# Altium PCB ALTAIR_PD_Soldier_V26.1c.PcbDoc (part 4 of 4)
Units mm, origin at the board's own origin, x right, y up, seen from the top; angles counter-clockwise.
Board outline 74 x 56 mm, 4 copper layers (Top Layer, Layer 1, Layer 2, Bottom Layer), stack 1.675 mm thick; 206 components, 124 nets, 616 pads, 540 vias.
Unrouted connection lines stored in the file: 139.
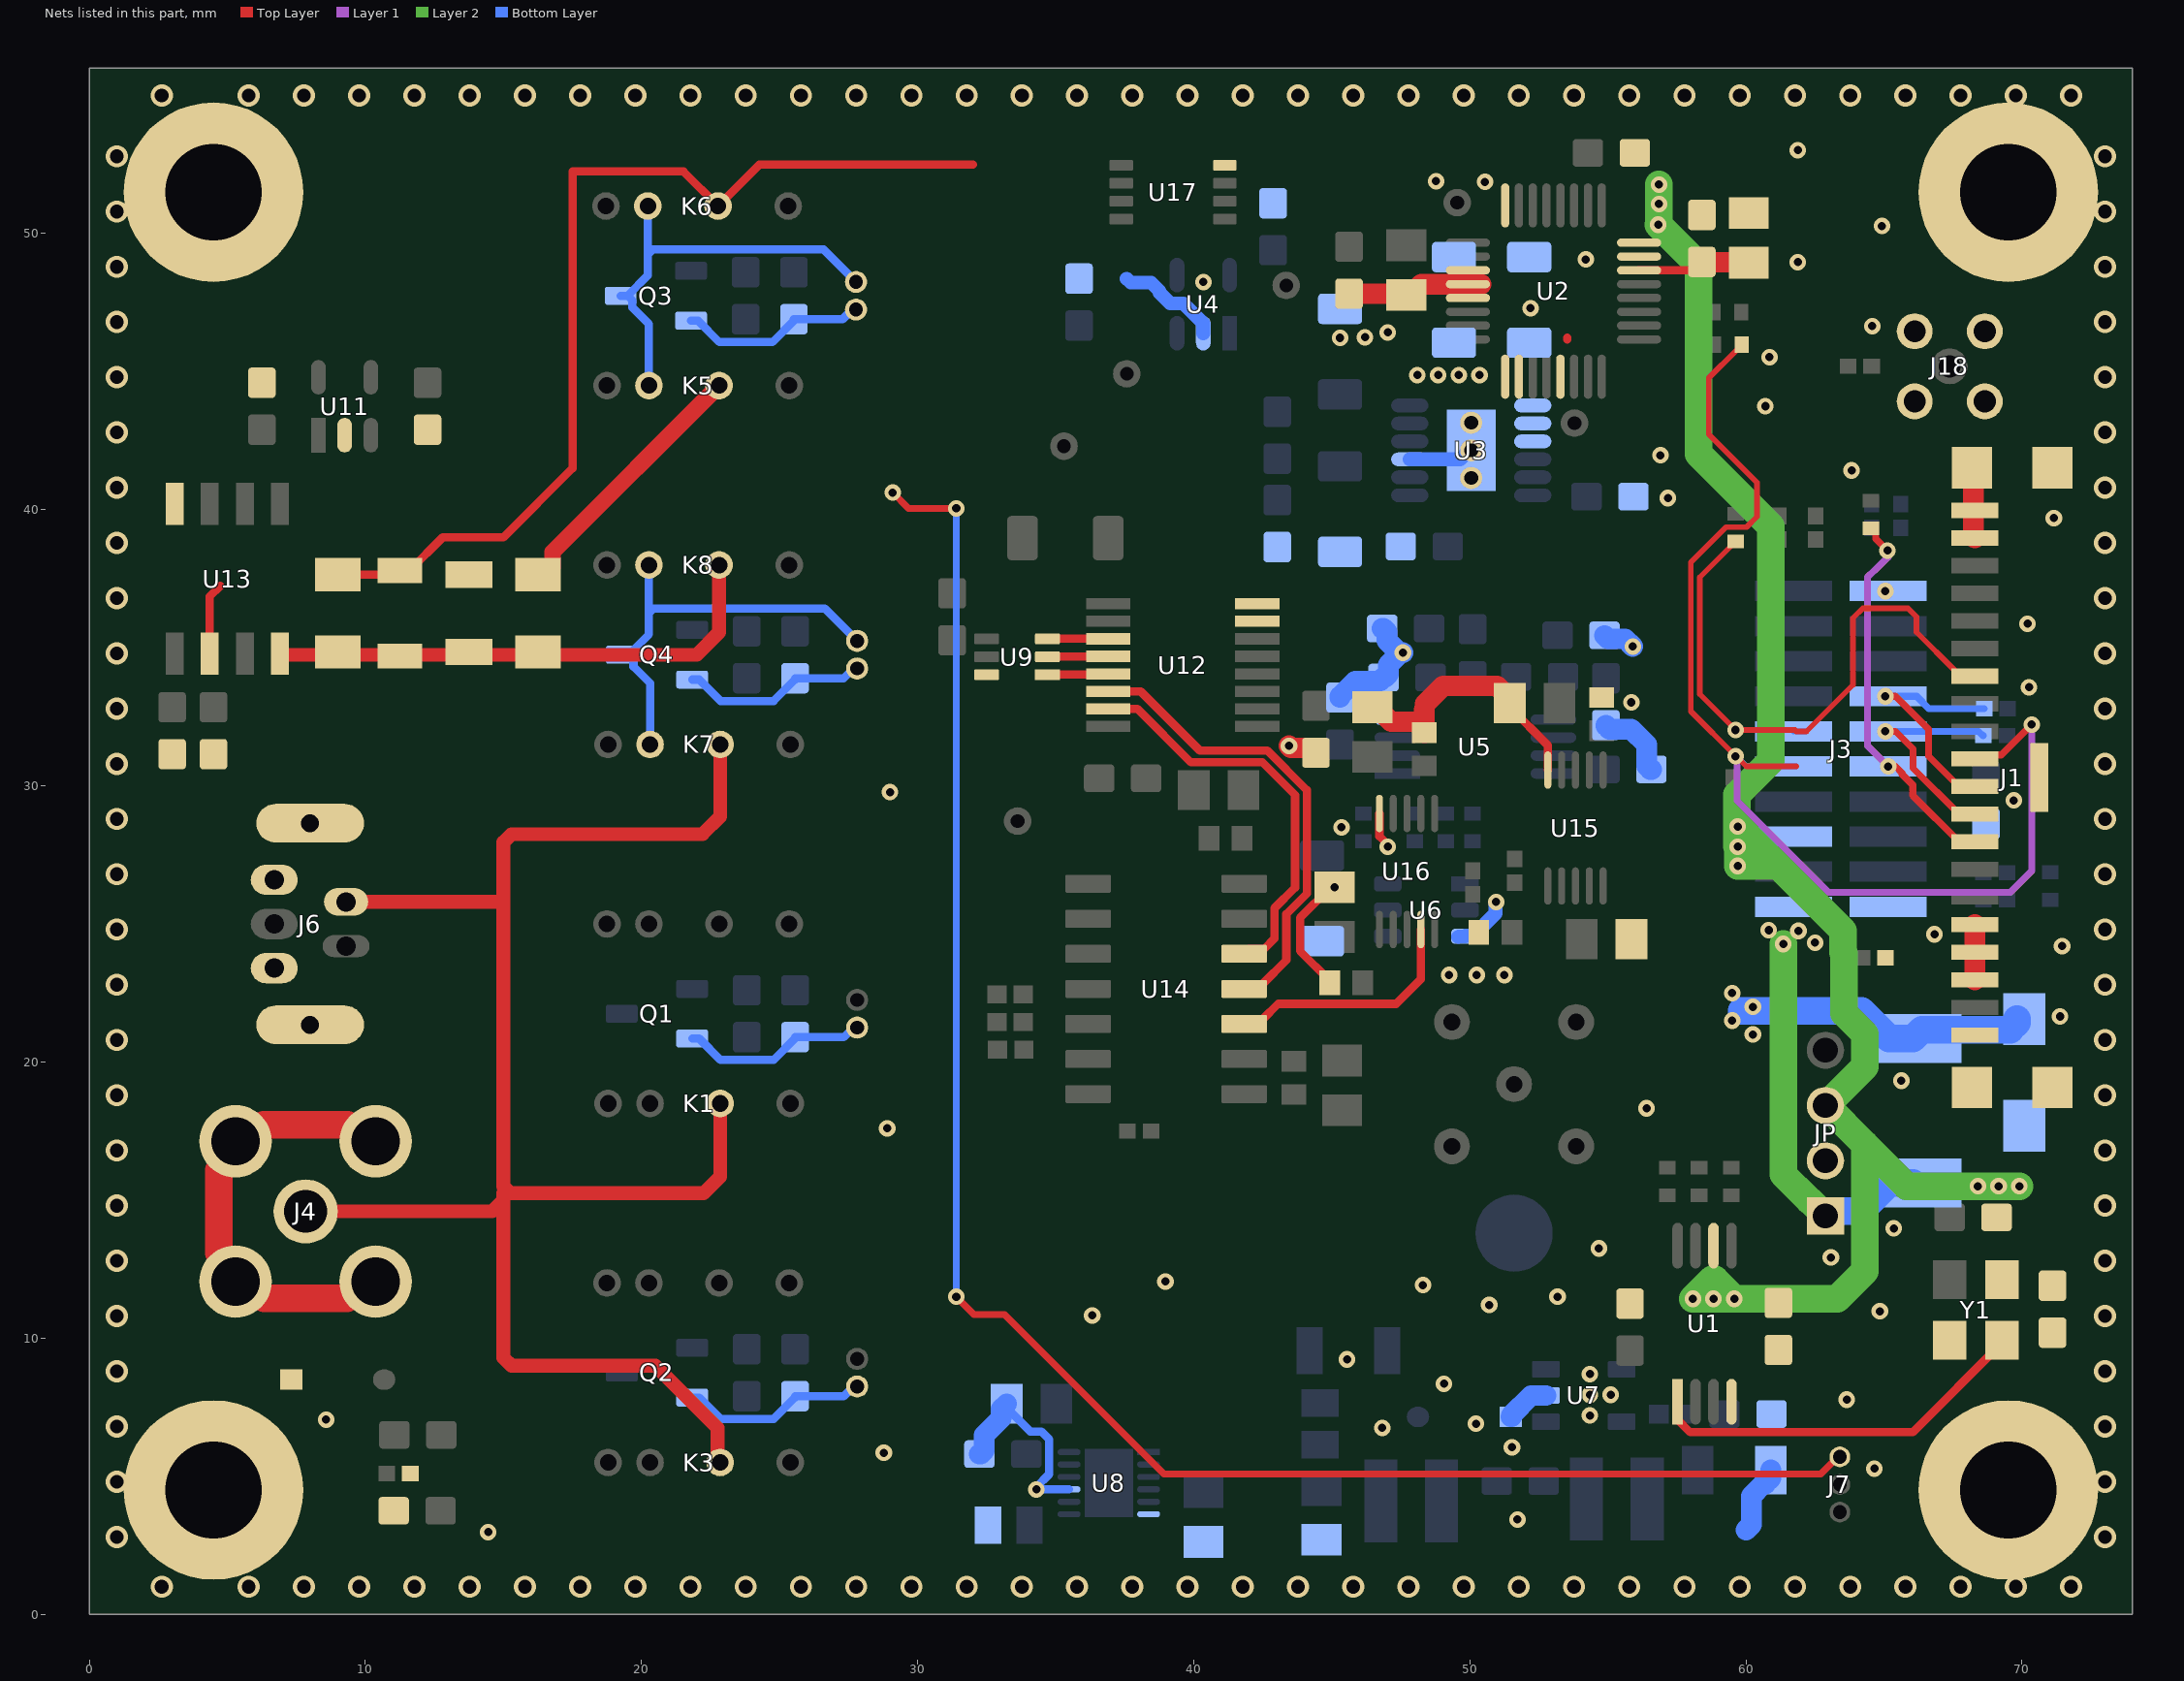
[diagram p5: the nets of this part, all layers, seen from the top]

## Via types
v1: diameter 0.6, hole 0.3, Top Layer to Bottom Layer, tented both sides, 212 vias
v2: diameter 0.6, hole 0.3, Top Layer to Bottom Layer, 206 vias
v3: diameter 0.8, hole 0.5, Top Layer to Bottom Layer, 122 vias

## Nets (pads, with @x,y where several pads share a name; then routed paths per layer and width w, separated by ;. In a path a pad name is that pad's centre, name@x,y a point inside that pad or via, vN(x,y) a via of type N, cw(c..) or ccw(c..) an arc to the next point about the centre after c; other vN are vias at no path point) (continued)
NetU1_1: U1.1 Y1.3 | length 14
  Top Layer w0.3: U1.1@57.525,7.7 57.565,7.659 57.565,7.011 57.981,6.595 66.045,6.595 69.275,9.825 Y1.3@69.275,9.925
NetU9_1: U9.1 U12.13 | length 2.2
  Top Layer w0.3: U9.1@34.7,34.025 34.716,34.041 36.884,34.041 U12.13@36.9,34.058
NetU9_2: U9.2 U12.12 | length 2.2
  Top Layer w0.3: U9.2@34.7,34.675 34.709,34.684 36.891,34.684 U12.12@36.9,34.693
NetU9_3: U9.3 U12.11 | length 2.2
  Top Layer w0.3: U9.3@34.7,35.325 34.701,35.326 36.899,35.326 U12.11@36.9,35.328
NetU12_14: U12.14 U14.11 | length 17.1
  Top Layer w0.3: U12.14@36.9,33.423 38.078,33.423 40.221,31.279 42.667,31.279 44.097,29.849 44.097,26.097 43.354,25.354 43.354,23.688 42.5,22.834 42.5,22.825 42.325,22.65 U14.11@41.825,22.65
NetU12_15: U12.15 U14.12 | length 14.9
  Top Layer w0.3: U12.15@36.9,32.788 37.963,32.788 39.898,30.852 42.49,30.852 43.67,29.672 43.67,26.32 42.927,25.577 42.927,24.477 42.545,24.095 42,24.095 U14.12@41.825,23.92
NetU14_10: U14.10 U16.9 | length 8.9
  Top Layer w0.3: U14.10@41.825,21.38 42,21.555 42.505,21.555 43.058,22.108 47.333,22.108 48.225,23 U16.9@48.225,24.8
PD_A: J4.1 J6.2 K1.3 K3.3 K7.3 | length 63.3
  Top Layer w0.5: J4.1@7.835,14.59 14.59,14.59 15,15 ; J6.2@9.3,25.8 14.95,25.8 15,25.75 ; 15,15.25 15,15 ; K3.3@22.85,5.5 22.754,5.596 22.754,6.746 20.5,9 15.293,9 15,9.293 15,15 ; K1.3@22.85,18.5 22.85,15.85 22.25,15.25 15.25,15.25 15,15.5 15,25.75 ; K7.3@22.85,31.5 22.85,28.893 22.207,28.25 15.293,28.25 15,27.957 15,25.75
PD_K: C0.2 D3.1 J4.2 J4.3 J4.4 J4.5 J6.1 R0.2 | length 16.7
  Top Layer w1: 7.825,11.44 7.835,11.45 ; J4.3@10.375,12.05 9.935,12.05 9.335,11.45 7.835,11.45 ; J4.2@10.375,17.13 9.935,17.13 9.34,17.725 7.7,17.725 6.33,17.725 5.735,17.13 J4.4@5.295,17.13 5.295,16.69 4.685,16.08 4.685,13.1 5.295,12.49 J4.5@5.295,12.05 5.735,12.05 6.335,11.45 7.835,11.45
SPI_MISO: J1.10 J3.11 R58.2 | length 44.7
  Top Layer w0.2: R58.2@59.85,45.975 59.85,45.925 59.7,45.775 59.65,45.775 58.654,44.779 58.654,42.731 60.4,40.985 60.4,39.754 60.019,39.373 59.277,39.373 58,38.096 58,32.7 v1(59.625,31.075) 59.646,31.075 60.016,30.705 61.824,30.705
  Top Layer w0.254: J1.10@68.291,30.975 68.439,31.123 69.248,31.123 v1(70.35,32.225)
  Layer 1 w0.254: v1(59.625,31.075) 59.678,31.022 59.678,29.462 62.993,26.147 69.572,26.147 70.35,26.925 v1(70.35,32.225)
  Bottom Layer w0.2: v1(59.625,31.075) 59.656,31.075 60.026,30.705 J3.11@61.723,30.705
SPI_MOSI: J1.13 J3.12 R5.1 | length 13.5
  Top Layer w0.254: R5.1@64.525,39.325 64.575,39.325 64.698,39.202 64.698,38.952 v1(65.125,38.525) ; v1@65.418,30.705 65.66,30.464 65.66,30.415 66.041,30.034 66.041,29.651 67.716,27.975 J1.13@68.291,27.975
  Layer 1 w0.254: v1@65.15,38.275 65.131,38.275 64.659,37.803 64.646,37.803 64.403,37.559 64.403,31.454 v1(65.152,30.705)
SPI_SCLK: J1.7 J3.09 R11.1 | length 23.3
  Top Layer w0.2: R11.1@59.625,38.85 58.327,37.552 58.327,33.323 v1(59.625,32.025) 61.774,32.025 61.824,31.975 62.192,31.975 63.875,33.658 63.875,36.074 64.233,36.432 65.867,36.432 66.175,36.124 66.175,35.567 J1.7@67.568,34.174 ; J1.7@67.568,34.123 J1.7@67.716,33.975
  Top Layer w0.254: J1.7@67.716,33.975 J1.7@68.291,33.975
  Bottom Layer w0.2: v1(59.625,32.025) 61.673,32.025 J3.09@61.723,31.975
STRT1: J1.12 J3.10 R6.1 | length 8.4
  Top Layer w0.254: v1(65.05,31.975) 65.418,31.975 66.05,31.343 66.05,30.641 67.716,28.975 J1.12@68.291,28.975
  Bottom Layer w0.254: J3.10@65.152,31.975 68.425,31.975 68.575,31.825 R6.1@68.6,31.825
STRT2: J1.11 J3.08 R7.1 | length 8.9
  Top Layer w0.254: v1(65.05,33.245) 65.418,33.245 66.614,32.049 66.614,31.077 67.716,29.975 J1.11@68.291,29.975
  Bottom Layer w0.254: v1(65.05,33.245) 66.18,33.245 66.625,32.8 R7.1@68.625,32.8
SYS_DVDD: C47.2 C48.2 C50.2 C51.2 J3.15 JP.3 R1.1 R60.2 R61.2 U1.6 U2.15 U2.16 Y1.4 | length 62.6
  Top Layer w0.5: R1.1@56.025,52.925 R1.1@56.275,52.675
  Layer 2 w1: v1(56.825,50.325) 58.28,48.87 58.28,42.02 60.895,39.405 60.895,30.903 59.678,29.685 v1@59.678,28.59 ; v1@56.85,50.35 v1(56.85,51.075) v1(56.85,51.775) ; v1@59.678,27.822 59.678,28.503 59.721,28.546 63.52,24.748 63.52,23.98 63.55,23.95 63.55,21.771 64.304,21.017 64.304,19.833 JP.3@62.896,18.425 ; v1(59.7,27.8) v1(59.7,27.1) 60.992,27.1 ; JP.3@62.875,18.425 JP.3@62.896,18.425 ; v1(69.9,15.5) v1(69.15,15.5) v1(68.4,15.5) 65.821,15.5 64.304,17.017 ; v1(59.575,11.425) 58.875,12.125 58.775,12.125 v1(58.075,11.425) v1(58.825,11.425) v1(59.575,11.425) ; v1(59.575,11.425) 63.3,11.425 64.304,12.429 64.304,17.017 ; JP.3@62.896,18.425 64.304,17.017
  other v1: 59.7,28.525
SYS_GND: C1.1 C2.1 C3.1 C4.1 C5.2 C6.1 C7.1 C8.1 C9.1 C10.1 C11.1 C12.1 C13.1 C14.1 C17.2 C18.2 C19.2 C20.2 C21.2 C24.2 C25.1 C26.1 C28.1 C29.1 C32.1 C37.1 C38.1 C39.1 C40.1 C41.1 C42.1 C43.1 C44.1 C45.1 C46.1 C47.1 C48.1 C49.1 C50.1 C51.1 C52.1 C53.2 C54.1 C55.1 C56.1 C57.1 C58.1 D1.1 D2.1 D4.2 H1.1 H2.1 H3.1 H4.1 J1.1 J1.2 J1.16 J1.17 J1.18 J1.20 J1.MP1 J1.MP2 J1.MP3 J1.MP4 J1.MP5 J3.02 J3.20 J6.5 J6.6 J7.3 J14.1 J15.1 J16.1 J17.2 J18.2 J18.3 J18.4 J18.5 J19.1 JP.2 Q1.2 Q2.2 Q3.2 Q4.2 R8.2 R14.1 R15.1 R17.1 R20.2 R22.1 R24.1 R31.1 R32.2 R37.2 R40.2 R41.2 R43.2 R70.2 R99.1 RT1.1 U1.4 U2.1 U2.14 U2.24 U2.27 U2.28 U2.29 U3.9 U3.13 U4.2 U5.4 U6.3 U7.2 U8.6 U8.9 U10.4 U11.2 U12.7 U12.8 U13.4 U15.5 U16.5 U17.4 Y1.2 | length 157.3
  Top Layer w0.254: v1(29.1,40.625) 29.675,40.05 v1(31.4,40.05) ; v1(31.4,11.5) 32.044,10.856 33.148,10.856 38.923,5.081 62.712,5.081 63.331,5.7 J7.3@63.4,5.7
  Top Layer w0.3: C41.1@44.925,22.875 44.925,22.95 43.85,24.025 43.85,25.225 44.95,26.325 v1(45.1,26.325) ; U16.5@46.725,29 46.725,28.181 47.025,27.881 v1(47.025,27.8) ; C40.1@51.45,32.85 52.825,31.475 U15.5@52.825,30.575 ; U2.14@56.129,48.671 58.096,48.671 C47.1@58.4,48.975
  Top Layer w0.5: C37.1@50.325,24.625 C37.1@50.325,24.7
  Top Layer w0.75: J17.2@6.65,66.6 J17.2@6.65,69.4 v1@8.025,69.4 ; v1@8.125,69.4 J17.2@9.5,69.4 ; v1(43.45,31.45) 43.525,31.375 44.3,31.375 44.425,31.25 C26.1@44.425,31.2 ; C45.1@45.625,47.825 C46.1@47.7,47.825 ; C44.1@46.475,32.85 46.625,32.85 47.15,32.325 48.35,32.325 ; C46.1@47.7,47.775 47.85,47.775 48.246,48.171 U2.28@49.929,48.171 U2.28@50.4,48.171 ; C43.1@48.35,31.925 48.35,32.325 ; 48.35,32.764 48.35,32.325 ; 48.38,32.971 49.029,33.62 50.98,33.62 51.45,33.15 C40.1@51.45,33 ; C47.1@58.4,48.975 58.413,48.963 60.087,48.963 C48.1@60.1,48.95 ; J1.MP1@68.186,41.525 68.238,41.473 68.238,39.028 J1.2@68.291,38.975 ; J1.18@68.291,22.975 J1.17@68.291,23.975 J1.16@68.291,24.975
  Bottom Layer w0.254: v1(31.4,11.5) v1(31.4,40.05)
  Bottom Layer w0.3: Q3.2@21.795,46.85 22.045,46.85 22.822,46.073 24.743,46.073 25.52,46.85 R43.2@25.52,46.9 27.285,46.9 27.635,47.25 J16.1@27.77,47.25 ; Q2.2@21.835,7.85 22.085,7.85 22.862,7.073 24.783,7.073 25.56,7.85 R40.2@25.56,7.9 27.325,7.9 27.675,8.25 J15.1@27.81,8.25 ; Q1.2@21.835,20.85 22.085,20.85 22.862,20.073 24.783,20.073 25.56,20.85 R37.2@25.56,20.9 27.325,20.9 27.675,21.25 J14.1@27.81,21.25 ; Q4.2@21.835,33.85 22.085,33.85 22.862,33.073 24.783,33.073 25.56,33.85 R20.2@25.56,33.9 27.325,33.9 27.675,34.25 J19.1@27.81,34.25 ; C20.2@33.225,7.475 34.077,6.623 34.482,6.623 34.763,6.342 34.763,5.07 34.3,4.606 v1(34.3,4.525) U8.9@35.484,4.525
  Bottom Layer w0.5: 37.571,48.371 37.719,48.223 38.46,48.223 38.753,47.93 38.753,47.869 39.151,47.47 39.624,47.47 40.346,46.748 U4.2@40.346,46.396 ; U3.9@47.825,41.825 49.644,41.825 49.969,42.15 U3.13@50.05,42.15 ; U6.3@49.575,24.525 49.6,24.55 U6.3@49.825,24.55 49.85,24.575 50.128,24.575 50.931,25.378 50.931,25.781 v1(50.95,25.8)
  Bottom Layer w0.75: R32.2@32.236,5.8 32.286,5.8 32.411,5.925 32.411,6.486 33.025,7.1 33.025,7.425 C20.2@33.225,7.625 ; C13.1@45.3,33.2 45.3,33.25 45.85,33.8 46.75,33.8 C11.1@46.875,33.925 46.925,33.925 47.05,34.05 47.05,34.386 v1@47.489,34.825 ; R24.1@46.825,35.7 46.875,35.7 47,35.575 47,35.264 47.439,34.825 v1@47.489,34.825 ; v1(47.575,34.825) v1@47.489,34.825 ; D1.1@51.48,7.15 51.505,7.15 51.509,7.154 51.509,7.214 52.22,7.925 U7.2@52.75,7.925 ; R22.1@54.875,35.45 55,35.325 55.625,35.325 v1(55.9,35.05) ; C10.1@54.925,32.2 54.925,32.179 55.05,32.054 55.846,32.054 56.404,31.496 56.404,30.725 56.529,30.6 C9.1@56.575,30.6 ; 60,3.05 60.2,3.25 60.2,4.286 60.639,4.725 60.7,4.725 60.9,4.925 R31.1@60.9,5.225
  other v1: 14.45,2.975 51.726,3.432 64.65,5.275 28.775,5.85 51.525,6.05 46.825,6.75 50.225,6.9 8.575,7.05 63.65,7.775 49.062,8.348 45.552,9.232 36.325,10.825 64.85,10.975 50.7,11.2 53.175,11.5 48.3,11.925 38.975,12.05 63.075,12.925 54.675,13.25 65.35,13.975 28.9,17.6 56.4,18.325 65.625,19.325 71.375,21.65 49.25,23.15 50.25,23.15 51.25,23.15 71.45,24.2 66.825,24.625 69.7,29.475 29,29.775 55.85,33.025 70.25,33.575 70.2,35.875 65.05,37.055 71.15,39.7 57.175,40.425 63.825,41.425 56.9,41.975 60.7,43.75 60.85,45.525 45.3,46.225 46.2,46.25 47.025,46.425 64.575,46.65 52.2,47.3 40.346,48.246 61.878,48.968 54.196,49.063 64.925,50.275 50.55,51.875 48.775,51.9 61.875,53.025 8.075,69.45 -4.175,71.075
  other v3: 2.625,1 5.775,1 7.775,1 9.775,1 11.775,1 13.775,1 15.775,1 17.775,1 19.775,1 21.775,1 23.775,1 25.775,1 27.775,1 29.775,1 31.775,1 33.775,1 35.775,1 37.775,1 39.775,1 41.775,1 43.775,1 45.775,1 47.775,1 49.775,1 51.775,1 53.775,1 55.775,1 57.775,1 59.775,1 61.775,1 63.775,1 65.775,1 67.775,1 69.775,1 71.775,1 1,2.8 73,2.8 1,4.8 73,4.8 1,6.8 73,6.8 1,8.8 73,8.8 1,10.8 73,10.8 1,12.8 73,12.8 1,14.8 73,14.8 1,16.8 73,16.8 1,18.8 73,18.8 1,20.8 73,20.8 1,22.8 73,22.8 1,24.8 73,24.8 1,26.8 73,26.8 1,28.8 73,28.8 1,30.8 73,30.8 1,32.8 73,32.8 1,34.8 73,34.8 1,36.8 73,36.8 1,38.8 73,38.8 1,40.8 73,40.8 1,42.8 73,42.8 1,44.8 73,44.8 1,46.8 73,46.8 1,48.8 73,48.8 1,50.8 73,50.8 1,52.8 73,52.8 2.625,55 5.775,55 7.775,55 9.775,55 11.775,55 13.775,55 15.775,55 17.775,55 19.775,55 21.775,55 23.775,55 25.775,55 27.775,55 29.775,55 31.775,55 33.775,55 35.775,55 37.775,55 39.775,55 41.775,55 43.775,55 45.775,55 47.775,55 49.775,55 51.775,55 53.775,55 55.775,55 57.775,55 59.775,55 61.775,55 63.775,55 65.775,55 67.775,55 69.775,55 71.775,55
SYS_VBAT: F1.1 J3.19 JP.1 | length 14.2
  Layer 2 w1: v1(61.35,24.275) 61.35,15.929 62.283,14.996 62.304,14.996 JP.1@62.875,14.425
  Bottom Layer w1: JP.1@62.875,14.425 63.05,14.6 64.17,14.6 65.19,15.62 F1.1@66.05,15.62
  other v1: 62.5,24.325 60.825,24.775 61.9,24.75
TIA_ADCIN: C55.2 R44.2 U2.2
TIA_GAIN_OUT: C31.2 K5.3 R46.2 | length 9.7
  Top Layer w0.6: R46.2@16.25,37.65 16.475,37.65 16.775,37.95 16.775,38.465 K5.3@22.81,44.5
TIA_GAIN_RELAY_GND: J16.2 K5.2 K6.2 Q3.3 | length 15.5
  Bottom Layer w0.3: Q3.3@19.245,47.75 Q3.3@19.495,47.75 ; K6.2@20.23,51 20.23,49.25 ; K5.2@20.27,44.5 20.27,46.725 19.67,47.325 19.67,47.575 Q3.3@19.495,47.75 ; J16.2@27.77,48.25 26.593,49.427 20.407,49.427 20.23,49.25 ; Q3.3@19.495,47.75 20.23,48.485 20.23,49.25
TIA_IN: C30.1 C31.1 K8.3 R45.1 R46.1 U13.8 | length 18.7
  Top Layer w0.5: U13.8@6.905,34.788 6.943,34.75 22,34.75 22.81,35.56 K8.3@22.81,38
TIA_OUT: C30.2 J_TIA.1 K6.3 R44.1 R45.2 U13.6 | length 39.7
  Top Layer w0.3: U13.6@4.365,34.788 4.365,36.865 4.75,37.25 ; R45.2@8.6,37.25 R45.2@9,37.65 11.1,37.65 C30.2@11.25,37.8 11.6,37.8 12.8,39 15,39 17.5,41.5 17.5,52.25 21.52,52.25 K6.3@22.77,51 24.27,52.5 32,52.5
TIA_RELAY_GND: J19.2 K7.2 K8.2 Q4.3 | length 15.5
  Bottom Layer w0.3: Q4.3@19.285,34.75 Q4.3@19.535,34.75 ; K8.2@20.27,38 20.27,36.25 ; K7.2@20.31,31.5 20.31,33.725 19.71,34.325 19.71,34.575 Q4.3@19.535,34.75 ; J19.2@27.81,35.25 26.633,36.427 20.447,36.427 20.27,36.25 ; Q4.3@19.535,34.75 20.27,35.485 20.27,36.25
VBAT: C1.2 C2.2 D4.1 F1.2 U3.1 U3.2 U3.3 | length 10.7
  Bottom Layer w1: 59.854,21.854 64.186,21.854 65.19,20.85 F1.2@66.05,20.85 66.375,21.175 69.565,21.175 69.825,21.435 D4.1@69.825,21.555
  other v1: 54.35,7.2 54.35,7.95 55.1,7.95 54.35,8.7 60.25,21 59.5,21.5 60.25,22 59.5,22.5 48.1,44.875 48.85,44.875 49.6,44.875 50.35,44.875
VBIAS: R33.2 TP6.1 U9.6
VGND_ADCIN: C58.2 R68.2 U2.5 | length 0.1
  Top Layer w0.3: 53.525,46.157 53.525,46.225
  other v1: 45.35,28.5
pads on no net: U1.7 U2.25 U3.5 U8.4 U8.7 U10.1 U10.3 U10.7 U10.8 U12.10 U13.3 U15.2 U15.3 U15.10 U16.2 U16.3 U16.10 U17.7
copper on no net: | length 2.1
  Top Layer w0.75: v1(44,52.05) 45.3,52.05 45.425,51.925 45.575,51.925 45.775,51.725 45.775,51.575
  other v1: 65.05,24.675

## Polygon pours and split planes (outlines as drawn)
no net on Top Solder "NONET_LTS_P001" (solid, shelved): 18 vertices, not listed, extent 0,0 74,56
no net on Top Solder "NONET_LTS_P003" (solid, shelved, pour order 5): 17.8,20.7 21.375,20.7 26.11,25.435 29.96,25.435 31.75,23.645 31.75,19.91 32.535,19.125 37.85,19.125 37.85,26.375 32.55,26.375 31.475,27.45 24.55,27.45
no net on Top Solder "NONET_LTS_P004" (solid, shelved, pour order 9): 24.675,15.35 46.625,15.35 48.35,17.075 48.35,21.95 48.85,22.45 54.35,22.45 54.85,21.95 54.85,16.45 54.35,15.95 52.225,15.95 49.625,13.35 25.975,13.35 21.25,8.625 17.95,8.625
no net on Top Solder "NONET_LTS_P002" (solid, shelved, pour order 31): 54 vertices, not listed, extent 3.3,4.575 24.15,43.15
no net on Bottom Solder "NONET_LBS_P001" (solid, shelved): 18 vertices, not listed, extent -0.044,0 74,56
no net on Bottom Solder "NONET_LBS_P004" (solid, shelved): 3.545,22.13 8.625,22.13 8.625,17.05 3.545,17.05
no net on Bottom Solder "NONET_LBS_P003" (solid, shelved): 6.625,33.775 5.9,33.05 5.9,30.2 6.3,29.8 8.6,29.8 9.075,30.275 9.075,33.2 8.5,33.775
no net on Bottom Solder "NONET_LBS_P002" (solid, shelved, pour order 14): 48.85,22.45 54.35,22.45 54.85,21.95 54.85,16.45 54.35,15.95 48.85,15.95 48.35,16.45 48.35,21.95
SYS_GND on Bottom Layer "SYS_GND_L04_P001" (solid, remove dead copper, shelved, pour order 92): 74,0 74,56 0,56 0,0
VBAT on Bottom Layer "VBAT_L04_P003" (solid, shelved, pour order 83): 59.162,23.1 58.85,22.788 58.85,21.475 59.85,20.475 60.425,20.475 61.35,21.4 61.35,21.725 59.975,23.1
VBAT on Bottom Layer "VBAT_L04_P002" (solid, shelved, pour order 58): 47.45,45.45 48.725,46.725 52.9,46.725 53.1,46.525 53.1,41.775 52.925,41.6 51.525,41.6 51.375,41.75 51.375,43.525 50.725,44.175 48.05,44.175 47.45,44.775
SYS_VBAT on Bottom Layer "SYS_VBAT_L04_P001" (solid, shelved, pour order 50): 62.975,25.225 62.375,25.825 60.925,25.825 60.2,25.1 60.2,24.5 60.75,23.95 62.6,23.95 62.975,24.325
VBAT on Bottom Layer "VBAT_L04_P001" (solid, shelved, pour order 55): 55.975,9.225 56.275,8.925 56.275,6.85 57.375,5.75 57.375,4.425 57.9,3.9 57.9,2.5 57.575,2.175 55.725,2.175 55.225,2.675 55.225,5.575 53.575,7.225 53.575,8.65 54.15,9.225
10V on Bottom Layer "10V_L04_P002" (solid, shelved, pour order 70): 23 vertices, not listed, extent 49.1,23.95 55.6,31.125
4V9 on Bottom Layer "4V9_L04_P001" (solid, shelved, pour order 79): 21 vertices, not listed, extent 43.575,26.875 48.4,32.35
10V on Bottom Layer "10V_L04_P004" (solid, shelved, pour order 73): 37.95,31.75 39.45,30.25 42.6,30.25 43.3,29.55 43.3,27.1 42.825,26.625 42.425,26.625 42.175,26.875 39.6,26.875 35.475,31 35.475,31.5 35.725,31.75 37.925,31.75
SYS_DVDD on Bottom Layer "SYS_DVDD_L04_P001" (solid, shelved, pour order 7): 60.55,28.425 60,28.975 59.6,28.975 59.175,28.55 59.175,27.125 59.55,26.75 59.9,26.75 60.1,26.95 60.1,27.45 60.55,27.9
ACF_SWA_IN on Bottom Layer "NETJ9_1_L04_P001" (solid, shelved, pour order 13): 52.58,20.2 50.6,20.2 50.6,18.2 52.62,18.2
GUARD on Bottom Layer "GUARD_L04_P001" (solid, shelved, pour order 20): 48.85,22.45 54.35,22.45 54.85,21.95 54.85,16.45 54.35,15.95 48.85,15.95 48.35,16.45 48.35,21.95
GUARD on Bottom Layer "GUARD_L04_P002" (solid, shelved, pour order 53): 6.625,33.775 5.9,33.05 5.9,30.2 6.3,29.8 8.6,29.8 9.075,30.275 9.075,33.2 8.5,33.775
GUARD on Bottom Layer "GUARD_L04_P003" (solid, shelved, pour order 54): 3.545,22.13 8.625,22.13 8.625,17.05 3.545,17.05
-16V on Bottom Layer "-16V_L04_P001" (solid, shelved, pour order 59): 23 vertices, not listed, extent 36.85,2.6 47.15,10.4
-11V on Bottom Layer "-11V_L04_P001" (solid, shelved, pour order 62): 19 vertices, not listed, extent 34.35,4.775 42.45,10.925
AVDD on Bottom Layer "AVDD_L04_P001" (solid, shelved, pour order 63): 43.975,47.425 45.3,48.75 45.3,49.825 44.925,50.2 42.5,50.2 41.775,50.925 40.825,50.925 40.4,50.5 40.4,48.325 41.3,47.425
A5VSW on Bottom Layer "A5VSW_L04_P001" (solid, shelved, pour order 64): 53.825,31.925 53.825,30.875 53.75,30.8 52.425,30.8 52,30.375 51.675,30.05 51.3,30.05 50.775,30.575 50.775,31.575 51.325,32.125 53.625,32.125
10V on Bottom Layer "10V_L04_P001" (solid, shelved, pour order 67): 24 vertices, not listed, extent 35.05,42.2 48.625,47.475
10V on Bottom Layer "10V_L04_P003" (solid, shelved, pour order 72): 49.775,36.35 49.425,36 49.425,35.3 49.85,34.875 50.55,34.875 50.875,34.55 50.875,33.625 51.225,33.275 52.175,33.275 52.45,33.55 52.45,35.425 51.525,36.35
GUARD on Top Layer "PDGUARDMAIN" (solid, pour order 101): 694 vertices, not listed, extent 6.715,4.38 37.295,32.62
GUARD on Top Layer "PDGUARDPOGO" (solid, pour order 103): 268 vertices, not listed, extent 21.69,4.4 52.721,20.32
GUARD on Top Layer "TIAINTERCONGUARD" (solid, pour order 100): 151 vertices, not listed, extent 24.23,30.38 26.51,39.12
GUARD on Top Layer "TIAGUARD" (solid, pour order 99): 162 vertices, not listed, extent 5.785,33.629 23.931,39.12
GUARD on Top Layer (solid, pour order 102): 152 vertices, not listed, extent 24.23,17.38 26.51,26.12
SYS_VBAT on Top Layer "SYS_VBAT_L01_P001" (solid, shelved, pour order 21): 62.975,25.225 62.375,25.825 60.925,25.825 60.2,25.1 60.2,24.5 60.75,23.95 62.6,23.95 62.975,24.325
SYS_GND on Top Layer "SYS_GND_L01_P002" (solid, remove dead copper, shelved, pour order 81): 74,56 53,56 53,54 54,54 54,42.75 54,41.15 58.875,36.275 58.875,23.125 60.25,21.75 60.25,17.75 61.25,16.75 64.5,16.75 65.5,17.75 66,17 74,17
SYS_GND on Top Layer "SYS_GND_L01_P001" (solid, remove dead copper, shelved, pour order 80): 17 vertices, not listed, extent 0,0 74,56
4V9 on Top Layer "4V9_L01_P001" (solid, remove dead copper, shelved, pour order 76): 27 vertices, not listed, extent 5,16.4 46.7,53.525
10V on Top Layer "10V_L01_P001" (solid, shelved, pour order 19): 43.275,29.775 42.475,30.575 41.5,30.575 41.225,30.3 41.225,26.725 41.85,26.1 42.925,26.1 43.275,26.45
GUARD on Top Layer "GUARD_L01_P002" (solid, shelved, pour order 4): 17.8,20.7 21.375,20.7 26.125,25.45 29.975,25.45 31.75,23.675 31.75,19.925 32.55,19.125 37.85,19.125 37.85,26.375 32.55,26.375 31.475,27.45 24.55,27.45
ACF_SWA_IN on Top Layer "NETJ9_1_L01_P001" (solid, shelved, pour order 6): 52.58,20.2 50.6,20.2 50.6,18.2 52.62,18.2
GUARD on Top Layer "GUARD_L01_P003" (solid, shelved, pour order 8): 17.95,8.625 21.25,8.625 25.975,13.35 49.625,13.35 52.225,15.95 54.35,15.95 54.85,16.45 54.85,21.95 54.35,22.45 48.85,22.45 48.35,21.95 48.35,17.075 46.625,15.35 24.675,15.35
SYS_DVDD on Top Layer "SYS_DVDD_L01_P001" (solid, shelved, pour order 11): 59.6,51.15 57.575,53.175 56.525,53.175 55.925,52.575 55.925,49.175 56.8,49.175 57.65,50.025 59.4,50.025 59.6,50.225
10V on Top Layer "10V_L01_P003" (solid, shelved, pour order 15): 13.15,42.15 13.15,42.75 11.675,44.225 10.925,44.225 10.55,43.85 10.55,42.725 10.725,42.55 10.725,41.875 11.05,41.55 12.55,41.55
10V on Top Layer "10V_L01_P004" (solid, shelved, pour order 28): 10.9,50.025 11.325,50.45 11.325,51.25 10.975,51.6 9.825,51.6 9.575,51.35 9.575,50.3 9.85,50.025
GUARD on Top Layer "GUARD_L01_P001" (solid, shelved, pour order 30): 54 vertices, not listed, extent 3.3,4.575 24.15,43.15
10V on Top Layer "10V_L01_P002" (solid, shelved, pour order 38): 18.025,45.025 15.85,45.025 14.825,46.05 14.825,47.425 16.9,49.5 18.075,49.5 18.35,49.225 18.35,45.35
-11V on Top Layer "-11V_L01_P002" (solid, shelved, pour order 41): 45.775,19.45 41.175,19.45 40.725,19.9 40.725,20.45 41.05,20.775 42.8,20.775 43.675,21.65 45.75,21.65 46.325,21.075 46.325,20
SYS_DVDD on Top Layer "SYS_DVDD_L01_P002" (solid, shelved, pour order 51): 60.45,27.8 61.2,27.8 61.2,28.525 60.45,28.525 60.275,28.7 60,28.975 59.6,28.975 59.175,28.55 59.175,27.125 59.55,26.75 59.9,26.75 60.1,26.95 60.1,27.45
SYS_DVDD on Top Layer "SYS_DVDD_L01_P003" (solid, shelved, pour order 52): 55.4,10.675 61.6,10.675 61.85,10.925 61.85,11.725 61.425,12.15 59.6,12.15 58.975,12.775 58.7,12.775 57.925,12 55.55,12 55.3,11.75 55.3,10.775
-11V on Top Layer "-11V_L01_P001" (solid, shelved, pour order 56): 17 vertices, not listed, extent 45.6,29.5 49.775,31.375
-11V on Top Layer "-11V_L01_P003" (solid, shelved, pour order 57): 53.95,37.15 54.575,36.525 54.575,35.425 54.575,31.875 53.725,31.025 53.2,31.025 52.35,31.875 52.35,36.275 53.225,37.15
A5VSW on Top Layer "A5VSW_L01_P001" (solid, shelved, pour order 65): 43.975,34.875 44.625,34.875 45.2,34.3 45.2,32.625 44.5,31.925 41.475,31.925 41.4,32 41.4,32.3 41.475,32.375 43.275,32.375 43.5,32.6 43.5,34.4
10V on Top Layer "10V_L01_P005" (solid, shelved, pour order 66): 17 vertices, not listed, extent 51.025,23.55 54.45,27.125
10V on Top Layer "10V_L01_P006" (solid, shelved, pour order 68): 19 vertices, not listed, extent 45.3,22.5 47.925,24.6
10V on Top Layer "10V_L01_P007" (solid, shelved, pour order 71): 37.725,32.4 38.05,32.075 38.05,31.375 36.975,30.3 36.025,30.3 35.4,30.925 35.4,31.7 36.1,32.4
10V on Top Layer "10V_L01_P008" (solid, shelved, pour order 74): 34.2,39.875 34.475,39.6 34.475,36.475 33.05,35.05 32.1,35.05 31.95,35.2 31.95,35.7 31.5,36.15 30.9,36.15 30.475,36.575 30.475,37.4 32.95,39.875
SYS_DVDD on Top Layer "SYS_DVDD_L01_P004" (solid, shelved, pour order 75): 67.975,15.024 68.437,14.561 68.438,11.588 68.9,11.125 71.4,11.125 71.75,11.475 71.75,14.4 70.125,16.025 68.375,16.025 67.975,15.625
SYS_GND on Layer 1 "SYS_GND_L02_P001" (solid, remove dead copper, shelved, pour order 88): 0,0 74,0 74,56 0,56
4V9 on Layer 1 "4V9_L02_P001" (solid, remove dead copper, shelved, pour order 84): 27 vertices, not listed, extent 5,16.4 46.7,53.525
GUARD on Layer 1 "GUARD_L02_P001" (solid, shelved, pour order 48): 54 vertices, not listed, extent 3.3,4.575 24.15,43.15
GUARD on Layer 1 "GUARD_L02_P002" (solid, shelved, pour order 82): 54.85,21.95 54.85,16.45 54.35,15.95 48.85,15.95 48.35,16.45 48.35,21.95 48.85,22.45 54.35,22.45
SYS_VBAT on Layer 2 "SYS_VBAT_L03_P001" (solid, shelved, pour order 90): 60.2,23.85 60.9,23.15 61.8,23.15 62.825,24.175 62.825,24.5 61.7,25.625 60.725,25.625 60.2,25.1
VBAT on Layer 2 "VBAT_L03_P001" (solid, shelved, pour order 61): 27 vertices, not listed, extent 47.65,6.475 60.7,45.6
SYS_GND on Layer 2 "SYS_GND_L03_P001" (solid, remove dead copper, shelved, pour order 93): 0,0 74,0 74,56 0,56
10V on Layer 2 "10V_L03_P002" (solid, shelved, pour order 49): 52.237,25.525 53.125,25.525 53.35,25.3 53.35,24.063 53.087,23.8 48.533,23.8 47.239,22.505 46.811,22.505 46.571,22.746 46.571,23.663 48.433,25.525
-11V on Layer 2 "-11V_L03_P001" (solid, shelved, pour order 77): 29 vertices, not listed, extent 39.782,8.102 55,37.15
A5VSW on Layer 2 "A5VSW_L03_P001" (solid, shelved, pour order 69): 51.775,32 52.075,31.7 52.075,30.325 51.775,30.025 51.125,30.025 50.825,30.325 50.825,31.725 51.1,32
10V on Layer 2 "10V_L03_P001" (solid, shelved, pour order 78): 46 vertices, not listed, extent 2.075,28.35 53.45,51.9
GUARD on Layer 2 "GUARD_L03_P001" (solid, shelved, pour order 86): 5.9,33.05 6.625,33.775 8.5,33.775 9.075,33.2 9.075,30.275 8.6,29.8 6.3,29.8 5.9,30.2
GUARD on Layer 2 "GUARD_L03_P002" (solid, shelved, pour order 87): 8.625,22.13 3.545,22.13 3.545,17.05 8.625,17.05
GUARD on Layer 2 "GUARD_L03_P003" (solid, shelved, pour order 89): 54.35,22.45 54.85,21.95 54.85,16.45 54.35,15.95 48.85,15.95 48.35,16.45 48.35,21.95 48.85,22.45

## Other copper
Top Layer:
  pour cut-out: 300 vertices and 0 holes, not listed, extent 7.331,4.996 23.359,32.004
  pour cut-out: 25.497,38.484 25.551,38.462 25.589,38.447 25.671,38.391 25.689,38.374 25.71,38.36 25.73,38.34 25.744,38.319 25.761,38.301 25.807,38.232 25.817,38.219 25.854,38.127 25.874,38.03 25.874,38.005 25.879,37.98 25.879,31.626 25.894,31.55 25.894,31.45 25.874,31.353 25.848,31.288 25.837,31.261 25.781,31.179 25.746,31.144 25.711,31.109 25.629,31.053 25.537,31.016 25.44,30.996 25.34,30.996 25.243,31.016 25.167,31.047 25.151,31.053 25.069,31.109 25.051,31.126 25.03,31.14 25.01,31.16 24.996,31.181 24.979,31.199 24.923,31.281 24.886,31.373 24.876,31.422 24.866,31.47 24.866,31.495 24.861,31.52 24.861,37.874 24.846,37.95 24.846,38.05 24.866,38.147 24.888,38.201 24.903,38.239 24.959,38.321 25.005,38.368 25.029,38.391 25.111,38.447 25.203,38.484 25.3,38.504 25.4,38.504
  pour cut-out: 25.517,12.464 25.609,12.427 25.691,12.371 25.761,12.301 25.817,12.219 25.854,12.127 25.874,12.03 25.874,12.005 25.879,11.98 25.879,5.52 25.874,5.495 25.874,5.47 25.854,5.373 25.817,5.281 25.761,5.199 25.691,5.129 25.609,5.073 25.517,5.036 25.42,5.016 25.32,5.016 25.223,5.036 25.131,5.073 25.049,5.129 24.979,5.199 24.923,5.281 24.886,5.373 24.866,5.47 24.866,5.495 24.861,5.52 24.861,11.98 24.866,12.005 24.866,12.03 24.886,12.127 24.923,12.219 24.979,12.301 25.049,12.371 25.131,12.427 25.223,12.464 25.32,12.484 25.42,12.484
  pour cut-out: 22.957,38.484 23.049,38.447 23.131,38.391 23.201,38.321 23.257,38.239 23.294,38.147 23.314,38.05 23.314,38.025 23.319,38 23.319,35.56 23.314,35.535 23.314,35.51 23.294,35.413 23.272,35.359 23.257,35.321 23.201,35.239 23.184,35.221 23.17,35.2 22.36,34.39 22.339,34.376 22.321,34.359 22.239,34.303 22.147,34.266 22.098,34.256 22.05,34.246 22.025,34.246 22,34.241 6.943,34.241 6.918,34.246 6.893,34.246 6.796,34.266 6.742,34.288 6.704,34.303 6.622,34.359 6.604,34.376 6.583,34.39 6.545,34.428 6.531,34.449 6.514,34.467 6.458,34.549 6.421,34.641 6.401,34.738 6.401,34.838 6.421,34.935 6.443,34.989 6.458,35.027 6.514,35.109 6.56,35.156 6.584,35.179 6.666,35.235 6.758,35.272 6.855,35.292 6.955,35.292 7.052,35.272 7.085,35.259 21.789,35.259 22.301,35.771 22.301,38 22.306,38.025 22.306,38.05 22.326,38.147 22.363,38.239 22.419,38.321 22.489,38.391 22.571,38.447 22.663,38.484 22.76,38.504 22.86,38.504
  pour cut-out: 28.525,28.254 28.55,28.254 28.647,28.234 28.701,28.212 28.739,28.197 28.821,28.141 28.839,28.124 28.86,28.11 31.271,25.699 36.175,25.699 36.2,25.694 36.225,25.694 36.322,25.674 36.414,25.637 36.496,25.581 36.566,25.511 36.622,25.429 36.659,25.337 36.679,25.24 36.679,25.14 36.659,25.043 36.622,24.951 36.566,24.869 36.496,24.799 36.414,24.743 36.322,24.706 36.225,24.686 36.2,24.686 36.175,24.681 31.06,24.681 31.035,24.686 31.01,24.686 30.913,24.706 30.859,24.728 30.821,24.743 30.739,24.799 30.721,24.816 30.7,24.83 28.289,27.241 24.711,27.241 23.395,25.926 23.395,25.077 23.39,25.052 23.39,25.027 23.371,24.929 23.349,24.876 23.333,24.838 23.278,24.755 23.26,24.738 23.246,24.717 23.17,24.64 23.149,24.626 23.131,24.609 23.049,24.553 22.957,24.516 22.86,24.496 22.76,24.496 22.663,24.516 22.609,24.538 22.571,24.553 22.489,24.609 22.442,24.655 22.419,24.679 22.363,24.761 22.326,24.853 22.306,24.95 22.306,25.05 22.326,25.147 22.348,25.201 22.363,25.239 22.378,25.26 22.378,26.137 22.383,26.161 22.383,26.186 22.402,26.284 22.424,26.337 22.44,26.375 22.495,26.458 22.513,26.475 22.527,26.496 22.64,26.61 24.14,28.11 24.161,28.124 24.179,28.141 24.261,28.197 24.31,28.217 24.353,28.234 24.409,28.246 24.45,28.254 24.475,28.254 24.5,28.259 28.5,28.259
  pour cut-out: 25.497,25.484 25.551,25.462 25.589,25.447 25.671,25.391 25.689,25.374 25.71,25.36 25.73,25.34 25.744,25.319 25.761,25.301 25.807,25.232 25.817,25.219 25.854,25.127 25.874,25.03 25.874,25.005 25.879,24.98 25.879,18.626 25.894,18.55 25.894,18.45 25.874,18.353 25.848,18.288 25.837,18.261 25.781,18.179 25.746,18.144 25.711,18.109 25.629,18.053 25.537,18.016 25.44,17.996 25.34,17.996 25.243,18.016 25.167,18.047 25.151,18.053 25.069,18.109 25.051,18.126 25.03,18.14 25.01,18.16 24.996,18.181 24.979,18.199 24.923,18.281 24.886,18.373 24.876,18.422 24.866,18.47 24.866,18.495 24.861,18.52 24.861,24.874 24.846,24.95 24.846,25.05 24.866,25.147 24.888,25.201 24.903,25.239 24.959,25.321 25.005,25.368 25.029,25.391 25.111,25.447 25.203,25.484 25.3,25.504 25.4,25.504
  pour cut-out: 51.747,19.684 51.839,19.647 51.921,19.591 51.991,19.521 52.047,19.439 52.084,19.347 52.104,19.25 52.104,19.225 52.109,19.2 52.109,16.75 52.104,16.725 52.104,16.7 52.084,16.603 52.047,16.511 52.01,16.456 51.991,16.429 51.974,16.411 51.96,16.39 49.56,13.99 49.539,13.976 49.521,13.959 49.439,13.903 49.347,13.866 49.298,13.856 49.25,13.846 49.225,13.846 49.2,13.841 25.371,13.841 23.17,11.64 23.149,11.626 23.131,11.609 23.049,11.553 22.957,11.516 22.86,11.496 22.76,11.496 22.663,11.516 22.609,11.538 22.571,11.553 22.489,11.609 22.442,11.655 22.419,11.679 22.363,11.761 22.326,11.853 22.306,11.95 22.306,12.05 22.326,12.147 22.348,12.201 22.363,12.239 22.419,12.321 22.436,12.339 22.45,12.36 24.8,14.71 24.821,14.724 24.839,14.741 24.921,14.797 24.97,14.817 25.013,14.834 25.069,14.846 25.11,14.854 25.135,14.854 25.16,14.859 48.989,14.859 51.091,16.961 51.091,19.2 51.096,19.225 51.096,19.25 51.116,19.347 51.153,19.439 51.209,19.521 51.279,19.591 51.361,19.647 51.453,19.684 51.55,19.704 51.65,19.704

## Silkscreen, mask and mechanical layers (free items; w line width, h text height)
Top Overlay:
  drawing of 4 lines, arcs and shapes, not listed
  text "WayWayWay" at 39.483,18.9 h0.8 r90
  text "ALTAIR PD Readout" at 32.875,10.35 h0.8
  text "Soldier" at 47.85,8.625 h0.8
  text "D.R.," at 49.5,6.652 h0.8
  text "P.D.B.," at 44.425,6.577 h0.8
  text "UVic," at 38.75,5.9 h0.8
  text "V26A (v26.1c)" at 38.9,4.492 h0.8
Bottom Overlay:
  text "TP9" at 50.65,52.35 h0.8
  text "TP2" at 46.025,49.025 h0.8 r270
  text "TP8" at 56.325,44.075 h0.8
  text "TP1" at 39.6,43.125 h0.8
  text "TP4" at 34.2,41.8 h0.8
  text "TP6" at 27.1,41.4 h0.8
  text "TP3" at 35.05,29.65 h0.8
  text "TP7" at -16.3,28.325 h0.8
  text "TP5" at 40.825,9.225 h0.8

## Dimensions
74,0 to 74,56 on Mechanical 1
0,0 to 74,0 on Mechanical 1